# Altium PCB RelayBoardV1.PcbDoc (part 1 of 2)
Units mil, origin at the board's own origin, x right, y up, seen from the top; angles counter-clockwise.
Board outline 3700.79 x 5244.09 mil, 2 copper layers (Top Layer, Bottom Layer); 35 components, 39 nets, 108 pads, 2924 vias.
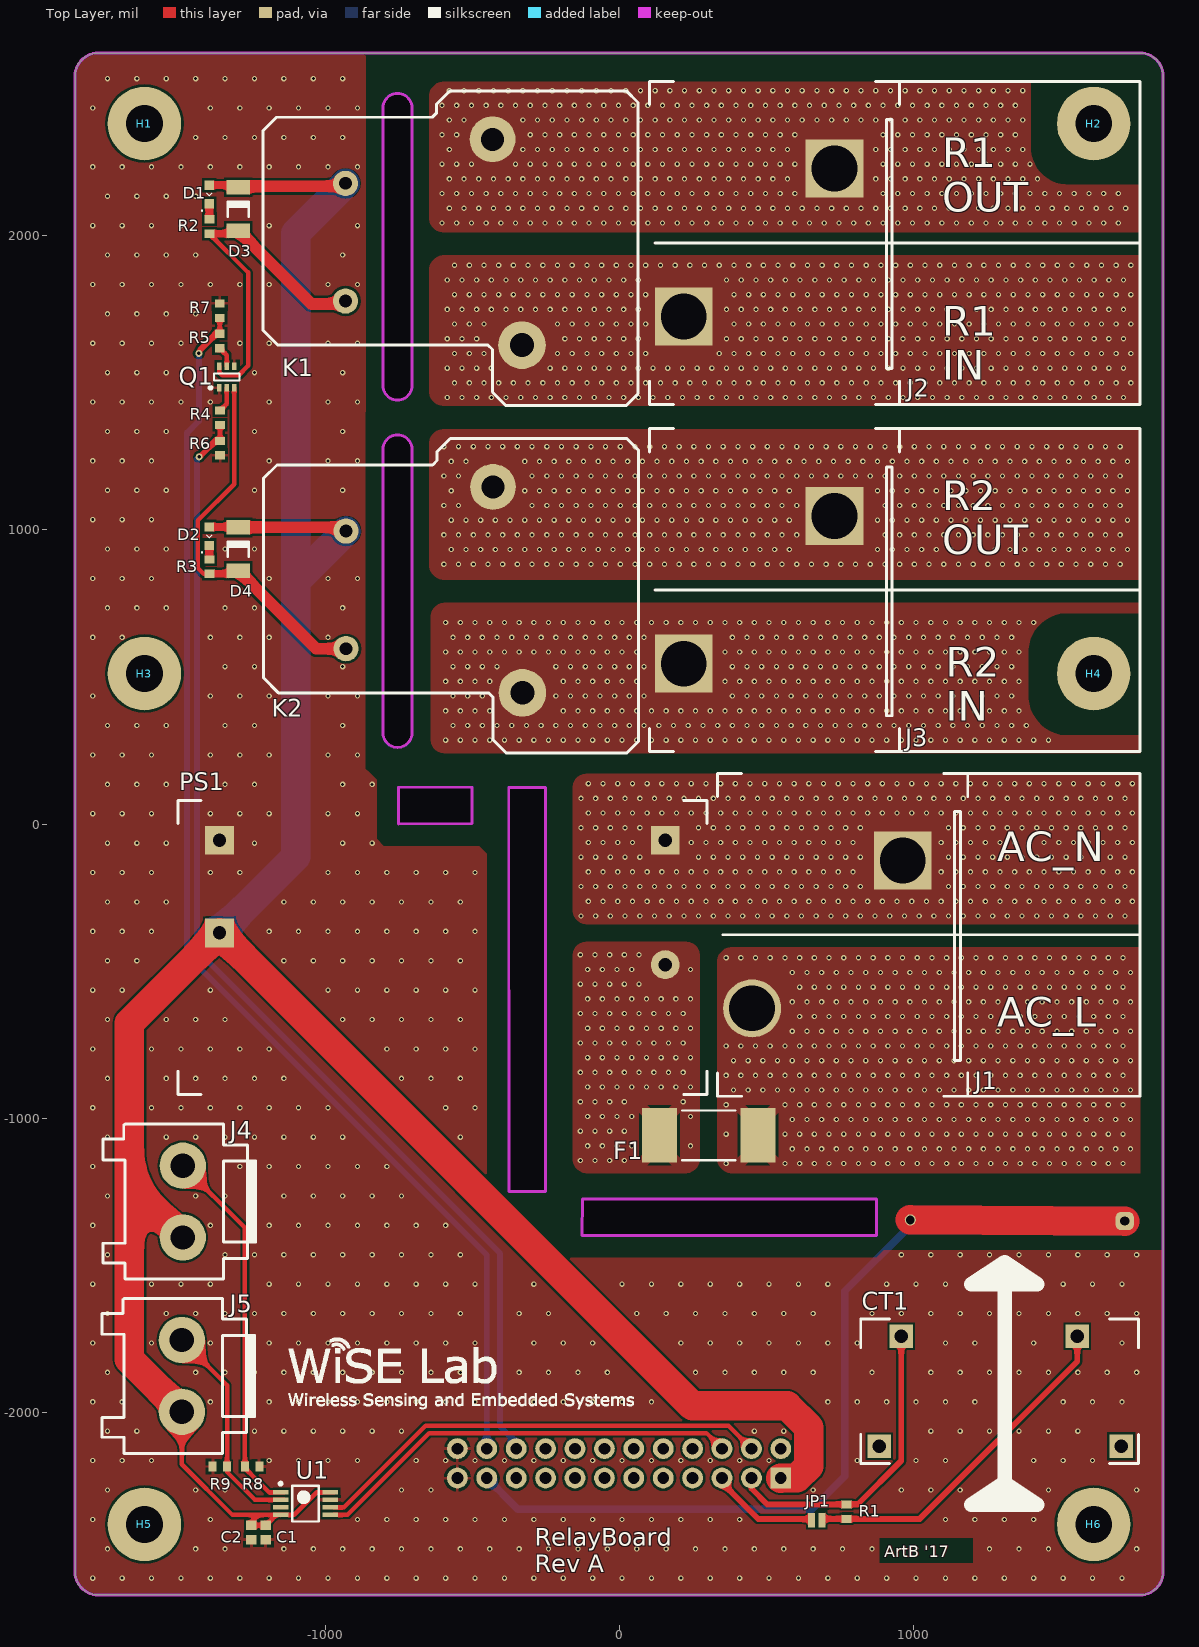
[diagram p0: Top Layer view]
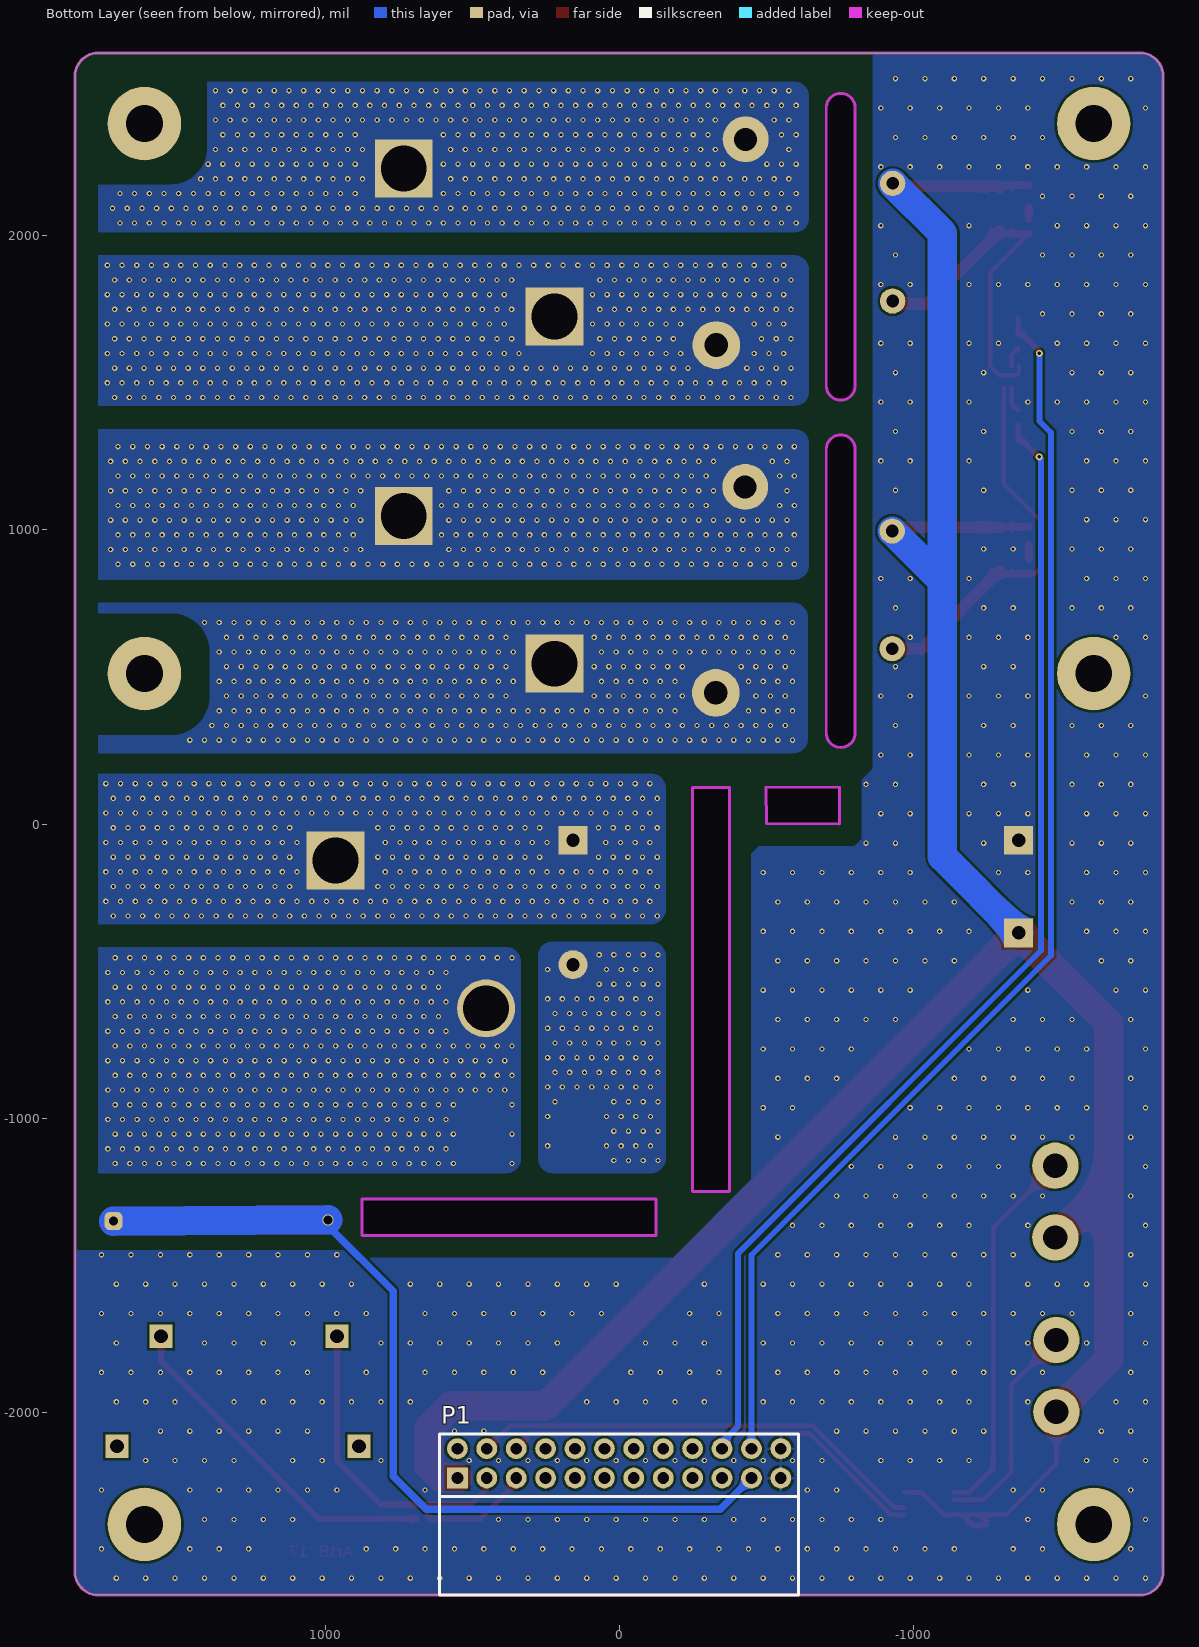
[diagram p1: Bottom Layer view, seen from below]

## Layer stack, top to bottom
Top Solder: solder mask 0.4, Solder Resist, Dk 3.5
Top Layer: signal copper 1.4
Dielectric 1: dielectric 12.6, FR-4, Dk 4.8
Bottom Layer: signal copper 1.4
Bottom Solder: solder mask 0.4, Solder Resist, Dk 3.5

## Board outline
-688.98,2622.05 688.98,2622.05 1771.65,2622.05 cw(c1771.65,2543.31) 1850.39,2543.31 1850.39,-2543.31 cw(c1771.65,-2543.31) 1771.65,-2622.05 -1771.65,-2622.05 cw(c-1771.65,-2543.31) -1850.39,-2543.31 -1850.39,2543.31 cw(c-1771.65,2543.31) -1771.65,2622.05
cut-out: -802.89,1490.75 -802.89,2435.63 cw(c-753.68,2435.63) -753.67,2484.85 cw(c-753.67,2435.63) -704.46,2435.63 -704.46,1490.75 cw(c-753.67,1490.75) -753.67,1441.54 cw(c-753.67,1490.75)
cut-out: -753.67,1323.43 ccw(c-753.67,1274.22) -802.89,1274.22 -802.89,309.65 ccw(c-753.67,309.65) -753.67,260.44 ccw(c-753.67,309.65) -704.46,309.65 -704.46,1274.22 ccw(c-753.67,1274.22)
cut-out: -124.97,-1275.61 -125.78,-1399.14 875.03,-1399.98 875,-1275
cut-out: -250.13,124.57 -375.34,124.31 -374.99,-1249.99 -250,-1249.99
cut-out: -500,125 -750,125 -750,0 -500.6,1.18

## Design rules (kind name [scope] priority, off if disabled: settings)
Clearance "Clearance - Ignore Keepout" [IsKeepOut] p1: gap=0 ignorepadtopadclearanceinfootprint=FALSE
Clearance [All] p2: gap=8 ignorepadtopadclearanceinfootprint=FALSE
ComponentClearance "Ignore Enclosure Part" [InComponent('H1')] p1: gap=0 collisioncheckmode=3 verticalgap=0 showdistances=FALSE
HoleSize [All] p1: absolutevalues=TRUE maxlimit=200 minlimit=8 maxpercent=80.000 minpercent=20.000
HoleToHoleClearance [All] p1: gap=12 allowstackedmicrovias=TRUE
MinimumSolderMaskSliver MinimumSolderMaskSliver_jumpers [HasFootprint('PAD-JUMPER-2-NO_NO_SILK')] p1: minsoldermaskwidth=2
MinimumSolderMaskSliver [All] p2: minsoldermaskwidth=4
PolygonConnect PolygonConnect_Vias [IsStitchingVia] p1: connectstyle=Direct reliefconductorwidth=10 reliefentries=4 polygonreliefangle="90 Angle" airgapwidth=10
PolygonConnect PolygonConnect_PS1 [HasFootprint('IRM-10-5')] p2: connectstyle=Direct reliefconductorwidth=40 reliefentries=4 polygonreliefangle="45 Angle" airgapwidth=10
PolygonConnect PolygonConnect_fUSE [HasFootprint('FUSE M10742X40L Schurter UMK 250 Series')] p3: connectstyle=Relief reliefconductorwidth=40 reliefentries=4 polygonreliefangle="45 Angle" airgapwidth=10
PolygonConnect PolygonConnect_HV [InNet('NEtF1_1') OR InNet('NetF1_2') OR InNet('NetJ1_2')  OR InNet('NetJ3_1')  OR InNet('NetJ3_2')  OR InNet('NetJ2_1')   OR InNet('NetJ2_2')] p4: connectstyle=Direct reliefconductorwidth=10 reliefentries=4 polygonreliefangle="90 Angle" airgapwidth=10
PolygonConnect [All] p5: connectstyle=Relief reliefconductorwidth=10 reliefentries=4 polygonreliefangle="90 Angle" airgapwidth=10
RoutingVias [All] p1: holewidth=28 width=50 viastyle="Through Hole" minholewidth=10 minwidth=20 maxholewidth=28 maxwidth=50
SilkToSilkClearance [All] p1: silktosilkclearance=8
SilkToSolderMaskClearance [IsPad] p1: minsilkscreentomaskgap=2 clearancetoexposedcopper=TRUE
SolderMaskExpansion [All] p1: expansion=4
Width [All] p1: maxlimit=500 minlimit=8 preferedwidth=25
24 further rules are at their usual default settings.

## Classes and differential pairs
polygon class PolygonClass_1: NETJ2_2_L01_P032
polygon class PolygonClass_2: NETJ2_2_L01_P032 NETJ2_2_L02_P060

## Components (designator, comment, footprint, x,y, rotation, side; value= is the part's Value field where it differs from the comment)
C1 "4.7uF" "CAPC1608X09L - CAP0603" -1201.5,-2409.81 r90 top
C2 "0.1uF" "CAPC1608X09L - CAP0603" -1250.75,-2409.81 r90 top
CT1 "Current Transformer" CT-CR8348 959.57,-1742.01 r0 top locked
D1 "Led Red" "LED-0603 .7MM TALL" -1393.44,2141.11 r90 top
D2 "Led Red" "LED-0603 .7MM TALL" -1393.44,978.94 r90 top
D3 "Diode" "SOD-80  MiniMELF" -1295.01,2091.14 r270 top
D4 "Diode" "SOD-80  MiniMELF" -1295.01,934.65 r270 top
F1 "Fuse 500mA" "FUSE M10742X40L Schurter UMK 250 Series" 304.7,-1058.69 r180 top
H1 "1/8in Hole by 1/4in Ring Fastener" "1/8in Fastener Hole"#1 -1614.17,2381.89 r0 top
H2 "1/8in Hole by 1/4in Ring Fastener" "1/8in Fastener Hole"#1 1614.17,2381.89 r0 top
H3 "1/8in Hole by 1/4in Ring Fastener" "1/8in Fastener Hole"#2 -1415.44,819.2 r0 top
H4 "1/8in Hole by 1/4in Ring Fastener" "1/8in Fastener Hole"#3 1409.91,829.91 r0 top
H5 "1/8in Hole by 1/4in Ring Fastener" "1/8in Fastener Hole"#4 -193.77,-1148.49 r0 top
H6 "1/8in Hole by 1/4in Ring Fastener" "1/8in Fastener Hole"#1 1614.17,-2381.89 r0 top
J1 "High Voltage Connector" "2POS Barrier Block Terminal"#1 452.22,-626.82 r90 top locked
J2 "High Voltage Connector" "2POS Barrier Block Terminal"#2 220.03,1726.34 r90 top locked (schematic designator J3)
J3 "High Voltage Connector" "2POS Barrier Block Terminal"#2 220.03,545.23 r90 top locked (schematic designator J4)
J4 "Thrmistor Connector" "2POS JST B02P-VL" -1483.78,-1284.13 r270 top locked
J5 "Thrmistor Connector" "2POS JST B02P-VL" -1487.04,-1876.99 r270 top locked
JP1 "JUMPER-PAD-2-NO" PAD-JUMPER-2-NO_NO_SILK 672.2,-2367.61 r0 top
K1 "Power Relay" T9AS1D12-5 -655.45,1953.55 r270 top locked
K2 "Power Relay" T9AS1D12-5 -653.87,771.26 r270 top locked
P1 "0.1\" Pitch, 2 Row, 24 Pos, Female, Right-Angle" "0.1 INCH 2 ROW 24 POS FEMALE RIGHT-ANGLE HEADER SULLINS" 0,-2174.41 r180 bottom locked
PS1 "AC/DC Power Supply" IRM-10-5 298.68,-919.49 r180 top
Q1 "NPN MOSFET" "SC-70-6  (SOT-363)" -1334.38,1520.28 r90 top
R1 "VAL?" "RESC1608X06L - RES0603" 773.45,-2338.6 r90 top
R2 "150" "RESC1608X06L - RES0603" -1393.44,2032.09 r90 top (schematic designator R1)
R3 "150" "RESC1608X06L - RES0603" -1393.44,875.59 r90 top (schematic designator R2)
R4 "1K" "RESC1608X06L - RES0603" -1357.09,1381.89 r90 top
R5 "1K" "RESC1608X06L - RES0603" -1358.13,1642.65 r270 top
R6 "10K" "RESC1608X06L - RES0603" -1357.09,1278.54 r90 top
R7 "10K" "RESC1608X06L - RES0603" -1358.13,1746 r270 top
R8 "10K" "RESC1608X06L - RES0603" -1248.06,-2184.7 r180 top
R9 "10K" "RESC1608X06L - RES0603" -1357.95,-2185.1 r0 top
U1 "ADC" "8L UMAX/USOP TSOP65P490X110-8L" -1066.65,-2311.17 r0 top

## Footprints (in the part's own frame and the unit in brackets; to place one, negate y for a bottom-side part, rotate by r counter-clockwise, add the part's x,y. Pads: shape width x height; smd on the part's side, far side on the other; paste and mask are expansions set on the pad)
"0.1 INCH 2 ROW 24 POS FEMALE RIGHT-ANGLE HEADER SULLINS" [mm] "Sullins 0.1\" Dual row 24 position female right-angle header"
  rect 1.8x1.8 hole 1.02: 1(-13.97,-1.27)
  round 1.8 hole 1.02: 2(-13.97,1.27) 3(-11.43,-1.27) 4(-11.43,1.27) 5(-8.89,-1.27) 6(-8.89,1.27) 7(-6.35,-1.27) 8(-6.35,1.27) 9(-3.81,-1.27) 10(-3.81,1.27) 11(-1.27,-1.27) 12(-1.27,1.27) 13(1.27,-1.27) 14(1.27,1.27) 15(3.81,-1.27) 16(3.81,1.27) 17(6.35,-1.27) 18(6.35,1.27) 19(8.89,-1.27) 20(8.89,1.27) 21(11.43,-1.27) 22(11.43,1.27) 23(13.97,-1.27) 24(13.97,1.27)
  silkscreen extent -15.5,-11.37 15.5,2.54, body extent -15.49,-11.34 15.49,1.5, height 5.08
"1/8in Fastener Hole"#1 [mil]
  round 250 hole 125: 1(0,0)
"1/8in Fastener Hole"#2 [mil]
  round 250 hole 125: 1(-198.73,-307.39)
"1/8in Fastener Hole"#3 [mil]
  round 250 hole 125: 1(204.27,-318.1)
"1/8in Fastener Hole"#4 [mil]
  round 250 hole 125: 1(-1420.4,-1233.4)
"2POS Barrier Block Terminal"#1 [mm] "CONN BARRIER STRIP 2CIRC 0.5\""
  round 5 hole 3.96: 1(0,0)
  rect 5x5 hole 3.96: 2(12.766,-13.018)
  silkscreen extent -7.6,-18.63 20.3,2.97, body extent -7.64,-18.62 20.3,2.97, height 22.61
"2POS Barrier Block Terminal"#2 [mm] "CONN BARRIER STRIP 2CIRC 0.5\""
  rect 5x5 hole 3.96: 1(0,0) 2(12.766,-13.018)
  silkscreen extent -7.6,-18.63 20.3,2.97, body extent -7.64,-18.62 20.3,2.97, height 22.61
"2POS JST B02P-VL" [mm] "CONN HEADER 2POS VL SERIES TIN"
  round 4 hole 2.1: 1(-3.1,0) 2(3.1,0)
  silkscreen extent -6.7,-6.9 6.7,6.3, body extent -6.7,-6.9 6.7,6.3, height 16.4
"8L UMAX/USOP TSOP65P490X110-8L" [mm] "TSOP, 8-Leads, Body 3.00x3.00mm, Pitch 0.65mm, IPC High Density"
  rect 1.35x0.4 smd mask+0.051: 1(-2.15,0.975) 2(-2.15,0.325) 3(-2.15,-0.325) 4(-2.15,-0.975) 5(2.15,-0.975) 6(2.15,-0.325) 7(2.15,0.325) 8(2.15,0.975)
  silkscreen extent -2.27,-1.55 1.15,1.85, body extent -2.51,-1.55 2.52,1.55, height 1.09
"CAPC1608X09L - CAP0603" [mm] "Chip Capacitor, 2-Leads, Body 1.60x0.80mm, IPC High Density"
  rect 0.8x0.9 smd: 1(-0.625,0) 2(0.625,0)
  body extent -0.87,-0.48 0.87,0.48, height 0.9
CT-CR8348 [mm] "TRANSF CURRENT .27\" OPENING PCB CR8348-2000"
  rect 2x2 hole 1.2: 1(0,0) 2(15.2,0) ""(-1.9,-9.5) ""(19,-9.5)
  silkscreen extent -3.5,-11 20.5,1.5, body extent -3.5,-10.1 20.5,0.6, height 25
"FUSE M10742X40L Schurter UMK 250 Series" [mm] "Molded Capacitor, 2-Leads, Body 10.70x4.20mm, IPC High Density"
  rect 3x4.7 smd: 1(-4.25,0) 2(4.25,0)
  silkscreen extent -2.29,-2.15 2.29,2.15, body extent -5.65,-2.11 5.65,2.09, height 3.97
IRM-10-5 [mm] "AC/DC Power Modules 5V 2A 10W 85-264Vin Encap PS"
  round 2.5 hole 1.15: AC1(3.6,-11.2)
  rect 2.5x2.5 hole 1.15: AC2(3.6,-21.95) V+(42.1,-13.95) V-(42.1,-21.95)
  silkscreen extent 0,-25.4 45.7,0, body extent 0,-25.4 45.7,0, height 21.5
"LED-0603 .7MM TALL" [mm] "Chip Diode, 2-Leads, Body 1.60x0.80mm, IPC High Density"
  rect 0.8x0.8 smd: A(0.8,0) K(-0.8,0)
  silkscreen extent -1.45,-0.25 0.13,0.68, body extent -1.01,-0.54 1.01,0.53, height 0.6
PAD-JUMPER-2-NO_NO_SILK [mil]
  rect 25x50 smd: 1(-17.72,0) 2(17.72,0)
"RESC1608X06L - RES0603" [mm] "Chip Resistor, 2-Leads, Body 1.60x0.80mm, IPC High Density"
  rect 0.7x0.85 smd: 1(-0.625,0) 2(0.625,0)
  body extent -0.87,-0.48 0.87,0.48, height 0.55
"SC-70-6  (SOT-363)" [mm] "TSOP, 6-Leads, Body 2.00x1.25mm, Pitch 0.65mm, IPC High Density"
  rect 0.648x0.406 smd mask+0.051: 1(-0.919,0.65) 2(-0.919,0) 3(-0.919,-0.65) 4(0.919,-0.65) 5(0.919,0) 6(0.919,0.65)
  silkscreen extent -1.04,-1.1 0.3,1.53, body extent -1.05,-1.1 1.05,1.1, height 1
"SOD-80  MiniMELF" [mm] "MELF Diode, 2-Leads, Body 3.50x1.50mm, IPC High Density"
  rect 1.25x2 smd: 1(-1.875,0) 2(1.875,0)
  silkscreen extent -0.65,-0.9 0.65,0.9, body extent -1.75,-0.75 1.75,0.75, height 1.5
T9AS1D12-5 [mil] "RELAY GEN PURPOSE SPST 30A 5V"
  round 162 hole 81: 1(325,325)
  round 156 hole 78: 2(-375,225)
  round 86 hole 43: 3(175,-275) 4(-225,-275)
  silkscreen extent -540,-555 530,720, body extent -545,-555 535,725, height 806

## Part data
C1: library part "CAP0603 4.7uF 10% 6.3V X7R", "SMT 0603 Ceramic Capacitor", Supplier Part Number 1=1276-2087-1-ND, TempCoeff=X7R, Tolerance=10%, Voltage=6.3V, Supplier 1=Digi-Key
C2: library part "CAP0603 0.1uF 10% 25V X7R", "SMT 0603 Ceramic Capacitor", Supplier Part Number 1=311-1341-1-ND, TempCoeff=X7R, Tolerance=10%, Voltage=25V, Supplier 1=Digi-Key, Supplier 2=Digi-Key, Supplier Part Number 2=490-1524-1-ND
CT1: library part "CT CR8348-2000", "TRANSF CURRENT .27\" OPENING PCB 50A", Supplier Part Number 1=582-1010-ND, Supplier 1=Digi-Key, url=https://www.digikey.com/product-detail/en/cr-magnetics-inc/CR8348-2000/582-1010-ND/1045166
D1 D2: library part "LED0603 RED 20mA 250mcd", "LED RED CLEAR 0603 SMD 250 mcd", Supplier Part Number 1=732-4978-1-ND, Supplier 1=Digi-Key
D3 D4: library part "Diode LL4150GS18", "DIODE GEN 50V 600MA MINI MELF", Supplier Part Number 1=LL4150GS18GICT-ND, Supplier 1=Digi-Key
F1: library part FUSE-Schurter-3404.2463.22, "FUSE UMK 250 FUSE WITH HOLDER 500MA F", Supplier Part Number 1=486-3187-1-ND, Supplier 1=Digi-Key, url=https://www.digikey.com/product-detail/en/3404.2463.22/486-3187-1-ND/5225261?curr=usd&WT.z_cid=ref_octopart_dkc_buynow&site=us
H1 H2 H3 H4 H5 H6: library part "1/8in by 1/4in Fastner Hole"
J1 J2 J3: library part "2POS CONN BARRIER STRIP 2CIRC 0.5\" 45A 600V", "MOLEX  0386608802", Supplier Part Number 1=WM4395-ND, Supplier 1=Digi-Key, url=http://www.mouser.com/ProductDetail/Molex/38660-8802/?qs=sGAEpiMZZMsntO7gZZwOWBznzzIjRi3IH61qEmgvOKA%3d
J4 J5: library part "2POS Thermistor Connector B02P-VL", "JST B02P-VL CONN HEADER 2POS VL SERIES TIN", Supplier Part Number 1=455-2361-ND, Supplier 1=Digi-Key, url=https://www.digikey.com/products/en?mpart=B02P-VL&v=455
K1 K2: library part T9AS1D12-5, "Single-Pole Single-Throw Relay", Supplier Part Number 1=PB1014-ND, Part Number=T9AS1D12-5, Supplier 1=Digi-Key
P1: library part "0.1\" 2 row 24 position female right-angle header sullins", "Sullins 0.1\" 2 row 24 position female right-angle header", Supplier Part Number 1=S5526-ND, Pitch=2.54mm, Positions=24, Rows=2, Supplier 1=Digi-Key, Supplier 2=Digi-Key, Supplier Part Number 2=S5565-ND
PS1: library part IRM-10-5, "AC/DC Power Modules 5V 2A 10W 85-264Vin Encap PS", Supplier Part Number 1=70387823, Mouser Link=http://www.mouser.com/ProductDetail/Mean-Well/IRM-10-5/?qs=sGAEpiMZZMuWiaalG5TUgH52QN1%252bIKAVGLeN4i9HrWU2QI8q%2fOO4Cw%3d%3d, Supplier 1=Allied, Supplier 2=Mouser, Supplier Part Number 2="Anonymous Daily Limit Reached"
Q1: library part SI1922EDH-T1-GE3CT, "2N-CH NPN MOSFET 20V 1.3A SOT-363", Supplier Part Number 1=SI1922EDH-T1-GE3CT-ND, Supplier 1=Digi-Key
R1: library part RES0603, "SMT 0603 Ceramic Resistor"
R2 R3: library part "RES0603 150 1% 1/10W_1", "SMT 0603 Ceramic Resistor", Supplier Part Number 1=311-150HRCT-ND, Supplier 1=Digi-Key
R4 R5: library part "RES0603 1K 1% 1/10W", "SMT 0603 Ceramic Resistor", Power=1/10W, Supplier Part Number 1=311-1.00KHRCT-ND, Tolerance=1%, Supplier 1=Digi-Key, Supplier 2=Digi-Key, Supplier 3=Digi-Key, Supplier Part Number 2=P1.00KHCT-ND, Supplier Part Number 3=RMCF0603FG1K00CT-ND
R6 R7 R8 R9: library part "RES0603 10K 1% 1/10W", "SMT 0603 Ceramic Resistor", Power=1/10W, Supplier Part Number 1=311-10.0KHRCT-ND, Tolerance=1%, Supplier 1=Digi-Key, Supplier 2=Digi-Key, Supplier 3=Digi-Key, Supplier Part Number 2=RMCF0603FT10K0CT-ND, Supplier Part Number 3=P10.0KHCT-ND
U1: library part MAX11612EUA+, "IC ADC I2C/SRL 12BIT 4CH 8UMAX", Supplier Part Number 1=MAX11612EUA+-ND, Supplier 1=Digi-Key, url=https://www.digikey.com/product-detail/en/maxim-integrated/MAX11612EUA-/MAX11612EUA--ND/2061925

## Free pads (board coordinates)
  round 24 hole 12: 2(-1428.57,1248.52) 3(-1429.25,1600.59)
  round 38 hole 30: 4(990.39,-1346.49)
  rrect60% 62x62 hole 31: 4(1719.62,-1350.46)

## Via types
v1: diameter 18, hole 10, Top Layer to Bottom Layer, tented both sides, 2924 vias

## Nets (pads, with @x,y where several pads share a name; then routed paths per layer and width w, separated by ;. In a path a pad name is that pad's centre, name@x,y a point inside that pad or via, vN(x,y) a via of type N, cw(c..) or ccw(c..) an arc to the next point about the centre after c; other vN are vias at no path point)
3.3V: P1.2
5V: C1.2 C2.2 D1.A D2.A D3.1 D4.1 J4.2 J5.2 K1.4 K2.4 P1.1 PS1.V+ U1.4 U1.8 | length 9910.8
  Top Layer w10: D4.1@-1296.69,1010.66 -1296.98,1010.44 D4.1@-1277.3,1010.44
  Top Layer w15: J5.2@-1487.04,-1999.04 -1487.04,-2177.53 -1314.9,-2349.67 -1226.83,-2349.67 ; U1.4@-1151.3,-2349.67 -1138.75,-2349.67 -1138.75,-2349.45 -1104.93,-2349.45 -1028.38,-2272.9 U1.8@-969.46,-2272.9 ; -1226.83,-2349.67 -1250.75,-2373.59 C2.2@-1250.75,-2385.21 C1.2@-1201.5,-2385.21 U1.4@-1165.96,-2349.67 ; -1226.83,-2349.67 U1.4@-1165.96,-2349.67 ; U1.4@-1165.96,-2349.67 -1151.41,-2349.67 U1.4@-1151.3,-2349.56 -1165.85,-2349.56 U1.4@-1165.96,-2349.67
  Top Layer w25: D2.A@-1393.44,1010.44 D4.1@-1296.98,1010.44 ; D1.A@-1393.44,2172.6 -1302.65,2172.6 D3.1@-1295.01,2164.96
  Top Layer w40: D4.1@-1295.01,1008.47 -1295.01,1008.98 -941.59,1008.98 K2.4@-928.87,996.26 ; D3.1@-1295.01,2164.96 -1291.27,2168.7 K1.4@-930.45,2168.7
  Top Layer w100: J5.2@-1487.04,-1999.04 -1665.3,-1820.77 -1665.3,-1224.66 ; J4.2@-1483.78,-1406.18 -1665.3,-1224.66 ; P1.1@550,-2224.41 549.34,-2224.32 604.26,-2224.32 645.43,-2183.9 645.43,-2052.58 571.83,-1978.98 249.9,-1978.98 PS1.V+@-1358.8,-370.28 -1665.3,-676.78 -1665.3,-1224.66
  Bottom Layer w100: PS1.V+@-1358.8,-370.28 -1099.44,-110.91 -1099.44,834.71 ; K1.4@-930.45,2178.55 -1099.44,2009.56 -1099.44,834.71 ; K2.4@-928.87,996.26 -1090.43,834.71 -1099.44,834.71
60HzAnt: P1.21 pad.4 | length 2271.7
  Bottom Layer w25: P1.21@-450,-2224.41 -344.37,-2330.04 655.82,-2330.04 767.94,-2217.91 767.94,-1588.24 990.39,-1365.79 pad.4@990.39,-1346.49
AIN0: J4.1 R8.2 U1.1 | length 1284
  Top Layer w15: J4.1@-1483.78,-1162.08 -1272.66,-1373.21 R8.2@-1272.66,-2184.7 -1272.66,-2190.74 -1190.51,-2272.9 U1.1@-1138.75,-2272.9
AIN1: J5.1 R9.2 U1.2 | length 746.3
  Top Layer w15: J5.1@-1487.04,-1754.94 -1333.34,-1908.64 R9.2@-1333.34,-2185.1 -1333.34,-2203.77 -1238.62,-2298.49 U1.2@-1138.75,-2298.49
CT_N: JP1.1 P1.5 | length 375.5
  Top Layer w20: P1.5@350,-2224.41 350,-2240.57 473.3,-2363.87 643.2,-2363.87 JP1.1@653.86,-2353.21
CT_P: CT1.1 P1.3 R1.2 | length 1052.6
  Top Layer w20: P1.3@450,-2224.41 450,-2260.14 503.86,-2313.99 R1.2@773.45,-2313.99 811.04,-2313.99 959.57,-2165.46 CT1.1@959.57,-1742.01
GND: C1.1 C2.1 P1.23 P1.24 PS1.V- Q1.1 Q1.4 R6.1 R7.1 R8.1 R9.1 U1.7
  other v1: -1790,-2565 -1690,-2565 -1590,-2565 -1490,-2565 -1390,-2565 -1290,-2565 -1190,-2565 -1090,-2565 -990,-2565 -890,-2565 -790,-2565 -690,-2565 -590,-2565 -490,-2565 -390,-2565 -290,-2565 -190,-2565 -90,-2565 10,-2565 110,-2565 210,-2565 310,-2565 410,-2565 510,-2565 610,-2565 710,-2565 810,-2565 910,-2565 1010,-2565 1110,-2565 1210,-2565 1310,-2565 1410,-2565 1510,-2565 1610,-2565 1710,-2565 -1740,-2465 -1440,-2465 -1340,-2465 -1140,-2465 -1040,-2465 -940,-2465 -840,-2465 -740,-2465 -640,-2465 -540,-2465 -440,-2465 -340,-2465 -240,-2465 -140,-2465 -40,-2465 60,-2465 160,-2465 260,-2465 360,-2465 460,-2465 560,-2465 660,-2465 760,-2465 860,-2465 1260,-2465 1360,-2465 1460,-2465 1760,-2465 -1790,-2365 -1390,-2365 -890,-2365 -790,-2365 -690,-2365 -590,-2365 -490,-2365 -390,-2365 -290,-2365 -190,-2365 -90,-2365 10,-2365 110,-2365 210,-2365 310,-2365 410,-2365 1110,-2365 1210,-2365 1310,-2365 1410,-2365 -1740,-2265 -1440,-2265 -1340,-2265 -740,-2265 -640,-2265 660,-2265 960,-2265 1060,-2265 1160,-2265 1260,-2265 1360,-2265 1460,-2265 1760,-2265 -1790,-2165 -1690,-2165 -1590,-2165 -1190,-2165 -1090,-2165 -990,-2165 -890,-2165 -690,-2165 -590,-2165 -490,-2165 -390,-2165 -290,-2165 -190,-2165 -90,-2165 10,-2165 110,-2165 210,-2165 310,-2165 410,-2165 510,-2165 810,-2165 1010,-2165 1110,-2165 1310,-2165 1410,-2165 1510,-2165 1610,-2165 -1740,-2065 -1640,-2065 -1240,-2065 -1140,-2065 -1040,-2065 -940,-2065 -840,-2065 -740,-2065 460,-2065 560,-2065 1060,-2065 1160,-2065 1260,-2065 1360,-2065 1460,-2065 1560,-2065 -1790,-1965 -1690,-1965 -1390,-1965 -1190,-1965 -1090,-1965 -990,-1965 -890,-1965 -790,-1965 -690,-1965 -590,-1965 -490,-1965 -290,-1965 -190,-1965 -90,-1965 10,-1965 110,-1965 710,-1965 810,-1965 910,-1965 1010,-1965 1110,-1965 1210,-1965 1310,-1965 1510,-1965 1610,-1965 1710,-1965 -1740,-1865 -1440,-1865 -1340,-1865 -1240,-1865 -1140,-1865 -1040,-1865 -940,-1865 -840,-1865 -740,-1865 -640,-1865 -540,-1865 -340,-1865 -240,-1865 -140,-1865 -40,-1865 260,-1865 360,-1865 460,-1865 560,-1865 660,-1865 860,-1865 1060,-1865 1160,-1865 1260,-1865 1360,-1865 1460,-1865 1560,-1865 1660,-1865 1760,-1865 -1790,-1765 -1590,-1765 -1390,-1765 -1190,-1765 -1090,-1765 -990,-1765 -890,-1765 -790,-1765 -690,-1765 -590,-1765 -490,-1765 -290,-1765 -190,-1765 -90,-1765 210,-1765 310,-1765 410,-1765 510,-1765 610,-1765 710,-1765 810,-1765 1110,-1765 1210,-1765 1310,-1765 1410,-1765 1710,-1765 -1740,-1665 -1540,-1665 -1440,-1665 -1340,-1665 -1240,-1665 -1140,-1665 -1040,-1665 -940,-1665 -840,-1665 -740,-1665 -640,-1665 -540,-1665 -340,-1665 -240,-1665 60,-1665 160,-1665 260,-1665 360,-1665 460,-1665 560,-1665 660,-1665 860,-1665 960,-1665 1060,-1665 1160,-1665 1260,-1665 1360,-1665 1460,-1665 1560,-1665 1660,-1665 1760,-1665 -1790,-1565 -1590,-1565 -1490,-1565 -1390,-1565 -1190,-1565 -1090,-1565 -990,-1565 -890,-1565 -790,-1565 -690,-1565 -590,-1565 -490,-1565 -290,-1565 10,-1565 110,-1565 210,-1565 310,-1565 410,-1565 510,-1565 610,-1565 710,-1565 910,-1565 1010,-1565 1110,-1565 1210,-1565 1310,-1565 1410,-1565 1510,-1565 1610,-1565 1710,-1565 -1740,-1465 -1340,-1465 -1240,-1465 -1140,-1465 -1040,-1465 -940,-1465 -840,-1465 -740,-1465 -640,-1465 -540,-1465 960,-1465 1060,-1465 1160,-1465 1260,-1465 1360,-1465 1460,-1465 1560,-1465 1660,-1465 1760,-1465 -1790,-1365 -1390,-1365 -1190,-1365 -1090,-1365 -990,-1365 -890,-1365 -790,-1365 -690,-1365 -590,-1365 -1740,-1265 -1440,-1265 -1340,-1265 -1240,-1265 -1140,-1265 -1040,-1265 -940,-1265 -840,-1265 -740,-1265 -1790,-1165 -1290,-1165 -1190,-1165 -1090,-1165 -990,-1165 -890,-1165 -790,-1165 -1740,-1065 -1540,-1065 -1440,-1065 -1340,-1065 -1240,-1065 -1140,-1065 -1040,-1065 -940,-1065 -540,-1065 -1790,-965 -1590,-965 -1490,-965 -1390,-965 -1290,-965 -1190,-965 -1090,-965 -990,-965 -590,-965 -490,-965 -1740,-865 -1540,-865 -1440,-865 -1340,-865 -1240,-865 -1140,-865 -740,-865 -640,-865 -540,-865 -1790,-765 -1590,-765 -1490,-765 -1390,-765 -1290,-765 -1190,-765 -790,-765 -690,-765 -590,-765 -490,-765 -1740,-665 -1540,-665 -1440,-665 -1340,-665 -940,-665 -840,-665 -740,-665 -640,-665 -540,-665 -1790,-565 -1690,-565 -1390,-565 -990,-565 -890,-565 -790,-565 -690,-565 -590,-565 -490,-565 -1740,-465 -1640,-465 -1140,-465 -1040,-465 -940,-465 -840,-465 -740,-465 -640,-465 -540,-465 -1790,-365 -1690,-365 -1590,-365 -1190,-365 -1090,-365 -990,-365 -890,-365 -790,-365 -690,-365 -590,-365 -490,-365 -1740,-265 -1640,-265 -1540,-265 -1140,-265 -1040,-265 -940,-265 -840,-265 -740,-265 -640,-265 -540,-265 -1790,-165 -1690,-165 -1590,-165 -1390,-165 -1290,-165 -990,-165 -890,-165 -790,-165 -690,-165 -590,-165 -490,-165 -1740,-65 -1640,-65 -1540,-65 -1240,-65 -940,-65 -840,-65 -1790,35 -1690,35 -1590,35 -1390,35 -1290,35 -1190,35 -990,35 -890,35 -1740,135 -1640,135 -1540,135 -1340,135 -1240,135 -940,135 -840,135 -1790,235 -1690,235 -1590,235 -1390,235 -1290,235 -1190,235 -990,235 -890,235 -1740,335 -1640,335 -1540,335 -1340,335 -1240,335 -940,335 -1790,435 -1390,435 -1290,435 -1190,435 -990,435 -890,435 -1340,535 -1240,535 -940,535 -1790,635 -1690,635 -1390,635 -1290,635 -1190,635 -990,635 -1740,735 -1640,735 -1540,735 -1340,735 -1240,735 -940,735 -1790,835 -1690,835 -1590,835 -1190,835 -990,835 -890,835 -1740,935 -1640,935 -1540,935 -1340,935 -1240,935 -1790,1035 -1690,1035 -1590,1035 -1740,1135 -1640,1135 -1540,1135 -1240,1135 -940,1135 -1790,1235 -1690,1235 -1590,1235 -1190,1235 -990,1235 -890,1235 -1740,1335 -1640,1335 -1540,1335 -1240,1335 -940,1335 -1790,1435 -1690,1435 -1590,1435 -1490,1435 -1390,1435 -1190,1435 -990,1435 -890,1435 -1740,1535 -1640,1535 -1540,1535 -1240,1535 -940,1535 -1790,1635 -1690,1635 -1590,1635 -1490,1635 -1290,1635 -1190,1635 -990,1635 -890,1635 -1740,1735 -1640,1735 -1540,1735 -1440,1735 -1790,1835 -1690,1835 -1590,1835 -1490,1835 -1390,1835 -1290,1835 -1190,1835 -990,1835 -890,1835 -1740,1935 -1640,1935 -1540,1935 -1440,1935 -940,1935 -1790,2035 -1690,2035 -1590,2035 -1490,2035 -1190,2035 -890,2035 -1740,2135 -1640,2135 -1540,2135 -1440,2135 -1790,2235 -1690,2235 -1590,2235 -1490,2235 -1390,2235 -1290,2235 -1190,2235 -1090,2235 -990,2235 -890,2235 -1440,2335 -1340,2335 -1240,2335 -1140,2335 -1040,2335 -940,2335 -1790,2435 -1390,2435 -1290,2435 -1190,2435 -1090,2435 -990,2435 -890,2435 -1740,2535 -1640,2535 -1540,2535 -1440,2535 -1340,2535 -1240,2535 -1140,2535 -1040,2535 -940,2535
GPIO1: P1.8
GPIO2: P1.10
GPIO3: P1.12
GPIO4: P1.14
GPIO5: P1.16
GPIO6: P1.18
GPIO7: P1.20 pad.2 R4.1 R6.2 | length 3972.9
  Top Layer w15: pad.2@-1428.57,1248.52 pad.2@-1421.72,1253.46 ; R6.2@-1372.02,1303.15 R6.2@-1357.09,1303.15 R4.1@-1357.09,1357.28
  Top Layer w20: pad.2@-1421.72,1253.46 R6.2@-1372.02,1303.15
  Bottom Layer w20: pad.2@-1428.57,1248.52 -1435.1,1242 -1435.1,-430.05 -404.85,-1460.3 -404.85,-2047.96 -350,-2102.81 P1.20@-350,-2124.41
GPIO8: P1.22 pad.3 R5.1 R7.2 | length 4319.8
  Top Layer w15: R5.1@-1358.13,1667.26 R7.2@-1358.13,1721.39
  Top Layer w20: pad.3@-1429.25,1600.59 -1424.53,1613.03 -1370.3,1667.26 R5.1@-1358.13,1667.26
  Bottom Layer w20: pad.3@-1429.25,1600.59 -1429.25,1370.61 -1468.93,1330.93 -1468.93,-447.1 -450,-1466.03 P1.22@-450,-2124.41
I2C_SCL: P1.6 U1.5 | length 1456.6
  Top Layer w15: U1.5@-969.46,-2349.67 -969.25,-2349.45 -923.71,-2349.45 -645.74,-2071.48 297.07,-2071.48 P1.6@350,-2124.41
I2C_SDA: P1.4 U1.6 | length 1566.9
  Top Layer w15: U1.6@-969.46,-2324.08 -969.46,-2323.86 -935.64,-2323.86 -658.25,-2046.48 372.07,-2046.48 P1.4@450,-2124.41
Leak_N: P1.13
Leak_P: P1.11
Mic_In: P1.15
NetCT1_2: CT1.2 JP1.2 R1.1 | length 1177.7
  Top Layer w10: JP1.2@689.3,-2353.21 JP1.2@690.3,-2353.33
  Top Layer w20: JP1.2@689.21,-2362.48 689.94,-2363.21 R1.1@773.45,-2363.21 1022.61,-2363.21 1557.99,-1827.82 CT1.2@1557.99,-1742.01
NetD1_K: D1.K R2.2 | length 42.3
  Top Layer w25: R2.2@-1393.44,2056.7 D1.K@-1393.44,2099.02
NetD2_K: D2.K R3.2 | length 47.2
  Top Layer w25: R3.2@-1393.44,900.2 D2.K@-1393.44,947.44
NetD3_2: D3.2 K1.3 Q1.6 R2.1 | length 1209.8
  Top Layer w15: R2.1@-1393.44,2007.48 -1261.7,1875.75 -1261.7,1558.05 -1293.55,1526.2 -1349.62,1526.2 -1359.88,1536.45 -1359.88,1556.46 Q1.6@-1359.97,1556.46
  Top Layer w25: R2.1@-1393.44,2007.48 -1304.86,2007.48 D3.2@-1295.01,2017.33
  Top Layer w40: D3.2@-1295.01,2017.33 -1046.39,1768.7 K1.3@-930.45,1768.7
NetD4_2: D4.2 K2.3 Q1.3 R3.1 | length 1290.5
  Top Layer w10: D4.2@-1304.86,850.99 D4.2@-1295.01,860.83
  Top Layer w15: R3.1@-1393.44,850.99 -1413.12,850.99 -1432.81,870.67 -1432.81,1031.85 -1308.79,1155.87 Q1.3@-1308.79,1484.1
  Top Layer w25: R3.1@-1393.44,850.99 D4.2@-1304.86,850.99
  Top Layer w40: D4.2@-1295.01,860.83 -1030.45,596.26 K2.3@-928.87,596.26
NetF1_1: F1.1 J1.1 | length 55.7
  Top Layer w10: J1.1@452.22,-626.82 J1.1@491.59,-666.19
  other v1: 363.91,-1154.87 563.91,-1154.87 613.91,-1154.87 663.91,-1154.87 713.91,-1154.87 763.91,-1154.87 813.91,-1154.87 863.91,-1154.87 913.91,-1154.87 963.91,-1154.87 1013.91,-1154.87 1063.91,-1154.87 1113.91,-1154.87 1163.91,-1154.87 1213.91,-1154.87 1263.91,-1154.87 1313.91,-1154.87 1363.91,-1154.87 1413.91,-1154.87 1463.91,-1154.87 1513.91,-1154.87 1563.91,-1154.87 1613.91,-1154.87 1663.91,-1154.87 1713.91,-1154.87 588.91,-1104.87 638.91,-1104.87 688.91,-1104.87 738.91,-1104.87 788.91,-1104.87 838.91,-1104.87 888.91,-1104.87 938.91,-1104.87 988.91,-1104.87 1038.91,-1104.87 1088.91,-1104.87 1138.91,-1104.87 1188.91,-1104.87 1238.91,-1104.87 1288.91,-1104.87 1338.91,-1104.87 1388.91,-1104.87 1438.91,-1104.87 1488.91,-1104.87 1538.91,-1104.87 1588.91,-1104.87 1638.91,-1104.87 1688.91,-1104.87 1738.91,-1104.87 363.91,-1054.87 563.91,-1054.87 613.91,-1054.87 663.91,-1054.87 713.91,-1054.87 763.91,-1054.87 813.91,-1054.87 863.91,-1054.87 913.91,-1054.87 963.91,-1054.87 1013.91,-1054.87 1063.91,-1054.87 1113.91,-1054.87 1163.91,-1054.87 1213.91,-1054.87 1263.91,-1054.87 1313.91,-1054.87 1363.91,-1054.87 1413.91,-1054.87 1463.91,-1054.87 1513.91,-1054.87 1563.91,-1054.87 1613.91,-1054.87 1663.91,-1054.87 1713.91,-1054.87 588.91,-1004.87 638.91,-1004.87 688.91,-1004.87 738.91,-1004.87 788.91,-1004.87 838.91,-1004.87 888.91,-1004.87 938.91,-1004.87 988.91,-1004.87 1038.91,-1004.87 1088.91,-1004.87 1138.91,-1004.87 1188.91,-1004.87 1238.91,-1004.87 1288.91,-1004.87 1338.91,-1004.87 1388.91,-1004.87 1438.91,-1004.87 1488.91,-1004.87 1538.91,-1004.87 1588.91,-1004.87 1638.91,-1004.87 1688.91,-1004.87 1738.91,-1004.87 363.91,-954.87 563.91,-954.87 613.91,-954.87 663.91,-954.87 713.91,-954.87 763.91,-954.87 813.91,-954.87 863.91,-954.87 913.91,-954.87 963.91,-954.87 1013.91,-954.87 1063.91,-954.87 1113.91,-954.87 1163.91,-954.87 1213.91,-954.87 1263.91,-954.87 1313.91,-954.87 1363.91,-954.87 1413.91,-954.87 1463.91,-954.87 1513.91,-954.87 1563.91,-954.87 1613.91,-954.87 1663.91,-954.87 1713.91,-954.87 388.91,-904.87 438.91,-904.87 488.91,-904.87 538.91,-904.87 588.91,-904.87 638.91,-904.87 688.91,-904.87 738.91,-904.87 788.91,-904.87 838.91,-904.87 888.91,-904.87 938.91,-904.87 988.91,-904.87 1038.91,-904.87 1088.91,-904.87 1138.91,-904.87 1188.91,-904.87 1238.91,-904.87 1288.91,-904.87 1338.91,-904.87 1388.91,-904.87 1438.91,-904.87 1488.91,-904.87 1538.91,-904.87 1588.91,-904.87 1638.91,-904.87 1688.91,-904.87 1738.91,-904.87 363.91,-854.87 413.91,-854.87 463.91,-854.87 513.91,-854.87 563.91,-854.87 613.91,-854.87 663.91,-854.87 713.91,-854.87 763.91,-854.87 813.91,-854.87 863.91,-854.87 913.91,-854.87 963.91,-854.87 1013.91,-854.87 1063.91,-854.87 1113.91,-854.87 1163.91,-854.87 1213.91,-854.87 1263.91,-854.87 1313.91,-854.87 1363.91,-854.87 1413.91,-854.87 1463.91,-854.87 1513.91,-854.87 1563.91,-854.87 1613.91,-854.87 1663.91,-854.87 1713.91,-854.87 388.91,-804.87 438.91,-804.87 488.91,-804.87 538.91,-804.87 588.91,-804.87 638.91,-804.87 688.91,-804.87 738.91,-804.87 788.91,-804.87 838.91,-804.87 888.91,-804.87 938.91,-804.87 988.91,-804.87 1038.91,-804.87 1088.91,-804.87 1138.91,-804.87 1188.91,-804.87 1238.91,-804.87 1288.91,-804.87 1338.91,-804.87 1388.91,-804.87 1438.91,-804.87 1488.91,-804.87 1538.91,-804.87 1588.91,-804.87 1638.91,-804.87 1688.91,-804.87 1738.91,-804.87 363.91,-754.87 413.91,-754.87 463.91,-754.87 513.91,-754.87 563.91,-754.87 613.91,-754.87 663.91,-754.87 713.91,-754.87 763.91,-754.87 813.91,-754.87 863.91,-754.87 913.91,-754.87 963.91,-754.87 1013.91,-754.87 1063.91,-754.87 1113.91,-754.87 1163.91,-754.87 1213.91,-754.87 1263.91,-754.87 1313.91,-754.87 1363.91,-754.87 1413.91,-754.87 1463.91,-754.87 1513.91,-754.87 1563.91,-754.87 1613.91,-754.87 1663.91,-754.87 1713.91,-754.87 588.91,-704.87 638.91,-704.87 688.91,-704.87 738.91,-704.87 788.91,-704.87 838.91,-704.87 888.91,-704.87 938.91,-704.87 988.91,-704.87 1038.91,-704.87 1088.91,-704.87 1138.91,-704.87 1188.91,-704.87 1238.91,-704.87 1288.91,-704.87 1338.91,-704.87 1388.91,-704.87 1438.91,-704.87 1488.91,-704.87 1538.91,-704.87 1588.91,-704.87 1638.91,-704.87 1688.91,-704.87 1738.91,-704.87 613.91,-654.87 663.91,-654.87 713.91,-654.87 763.91,-654.87 813.91,-654.87 863.91,-654.87 913.91,-654.87 963.91,-654.87 1013.91,-654.87 1063.91,-654.87 1113.91,-654.87 1163.91,-654.87 1213.91,-654.87 1263.91,-654.87 1313.91,-654.87 1363.91,-654.87 1413.91,-654.87 1463.91,-654.87 1513.91,-654.87 1563.91,-654.87 1613.91,-654.87 1663.91,-654.87 1713.91,-654.87 588.91,-604.87 638.91,-604.87 688.91,-604.87 738.91,-604.87 788.91,-604.87 838.91,-604.87 888.91,-604.87 938.91,-604.87 988.91,-604.87 1038.91,-604.87 1088.91,-604.87 1138.91,-604.87 1188.91,-604.87 1238.91,-604.87 1288.91,-604.87 1338.91,-604.87 1388.91,-604.87 1438.91,-604.87 1488.91,-604.87 1538.91,-604.87 1588.91,-604.87 1638.91,-604.87 1688.91,-604.87 1738.91,-604.87 613.91,-554.87 663.91,-554.87 713.91,-554.87 763.91,-554.87 813.91,-554.87 863.91,-554.87 913.91,-554.87 963.91,-554.87 1013.91,-554.87 1063.91,-554.87 1113.91,-554.87 1163.91,-554.87 1213.91,-554.87 1263.91,-554.87 1313.91,-554.87 1363.91,-554.87 1413.91,-554.87 1463.91,-554.87 1513.91,-554.87 1563.91,-554.87 1613.91,-554.87 1663.91,-554.87 1713.91,-554.87 588.91,-504.87 638.91,-504.87 688.91,-504.87 738.91,-504.87 788.91,-504.87 838.91,-504.87 888.91,-504.87 938.91,-504.87 988.91,-504.87 1038.91,-504.87 1088.91,-504.87 1138.91,-504.87 1188.91,-504.87 1238.91,-504.87 1288.91,-504.87 1338.91,-504.87 1388.91,-504.87 1438.91,-504.87 1488.91,-504.87 1538.91,-504.87 1588.91,-504.87 1638.91,-504.87 1688.91,-504.87 1738.91,-504.87 363.91,-454.87 413.91,-454.87 463.91,-454.87 513.91,-454.87 563.91,-454.87 613.91,-454.87 663.91,-454.87 713.91,-454.87 763.91,-454.87 813.91,-454.87 863.91,-454.87 913.91,-454.87 963.91,-454.87 1013.91,-454.87 1063.91,-454.87 1113.91,-454.87 1163.91,-454.87 1213.91,-454.87 1263.91,-454.87 1313.91,-454.87 1363.91,-454.87 1413.91,-454.87 1463.91,-454.87 1513.91,-454.87 1563.91,-454.87 1613.91,-454.87 1663.91,-454.87 1713.91,-454.87
NetF1_2: F1.2 PS1.AC1
  other v1: -132.01,-1144.67 -82.01,-1144.67 -32.01,-1144.67 17.99,-1144.67 -107.01,-1094.67 -57.01,-1094.67 -7.01,-1094.67 42.99,-1094.67 242.99,-1094.67 -132.01,-1044.67 -82.01,-1044.67 -32.01,-1044.67 17.99,-1044.67 -107.01,-994.67 -57.01,-994.67 -7.01,-994.67 42.99,-994.67 242.99,-994.67 -132.01,-944.67 -82.01,-944.67 -32.01,-944.67 17.99,-944.67 217.99,-944.67 -107.01,-894.67 -57.01,-894.67 -7.01,-894.67 42.99,-894.67 92.99,-894.67 142.99,-894.67 192.99,-894.67 242.99,-894.67 -132.01,-844.67 -82.01,-844.67 -32.01,-844.67 17.99,-844.67 67.99,-844.67 117.99,-844.67 167.99,-844.67 217.99,-844.67 -107.01,-794.67 -57.01,-794.67 -7.01,-794.67 42.99,-794.67 92.99,-794.67 142.99,-794.67 192.99,-794.67 242.99,-794.67 -132.01,-744.67 -82.01,-744.67 -32.01,-744.67 17.99,-744.67 67.99,-744.67 117.99,-744.67 167.99,-744.67 217.99,-744.67 -107.01,-694.67 -57.01,-694.67 -7.01,-694.67 42.99,-694.67 92.99,-694.67 142.99,-694.67 192.99,-694.67 242.99,-694.67 -132.01,-644.67 -82.01,-644.67 -32.01,-644.67 17.99,-644.67 67.99,-644.67 117.99,-644.67 167.99,-644.67 217.99,-644.67 -107.01,-594.67 -57.01,-594.67 -7.01,-594.67 42.99,-594.67 92.99,-594.67 142.99,-594.67 192.99,-594.67 242.99,-594.67 -132.01,-544.67 -82.01,-544.67 -32.01,-544.67 17.99,-544.67 67.99,-544.67 -107.01,-494.67 -57.01,-494.67 -7.01,-494.67 42.99,-494.67 242.99,-494.67 -132.01,-444.67 -82.01,-444.67 -32.01,-444.67 17.99,-444.67 67.99,-444.67